# Altium PCB Chip_Tester.PcbDoc
Units mil, origin at the board's own origin, x right, y up, seen from the top; angles counter-clockwise.
Board outline 6000 x 4000 mil, 2 copper layers (Top Layer, Bottom Layer); 2 components, 0 nets, 82 pads, 0 vias.
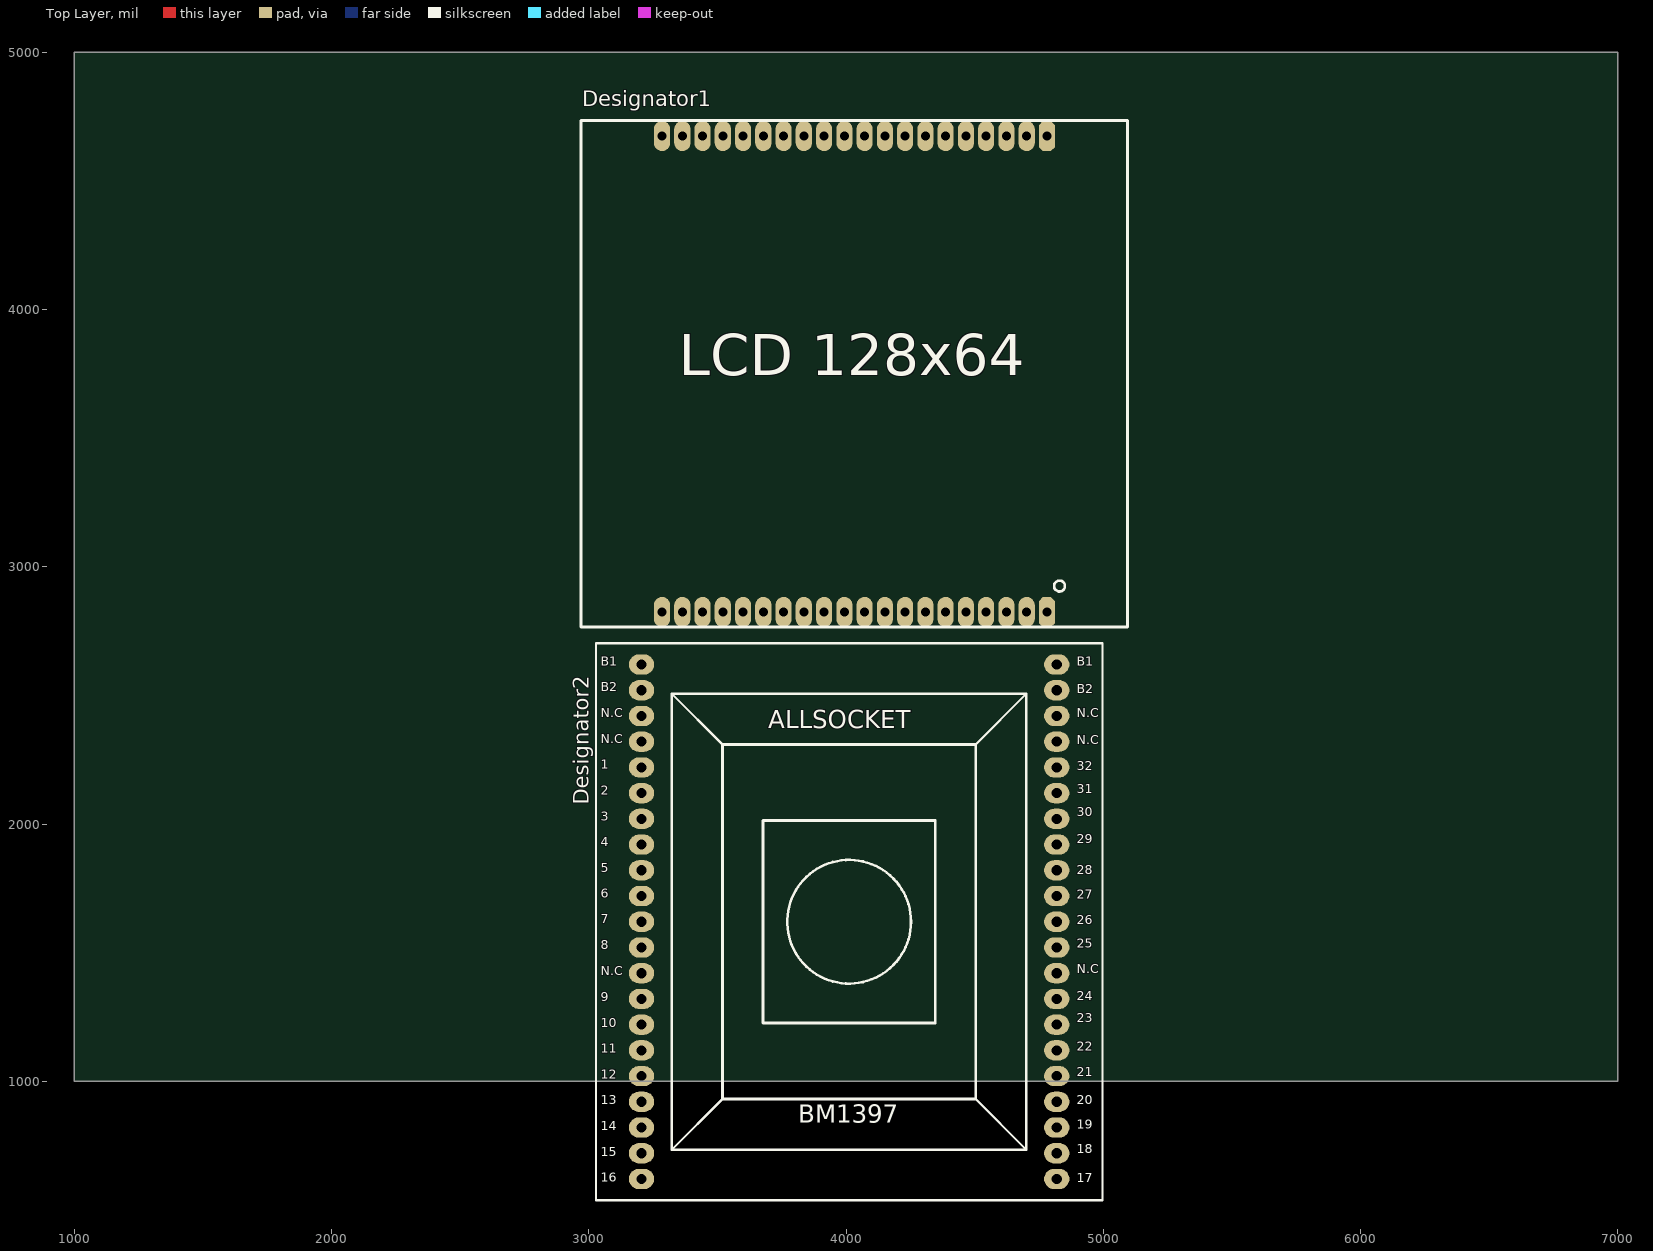
[diagram p0: Top Layer view]
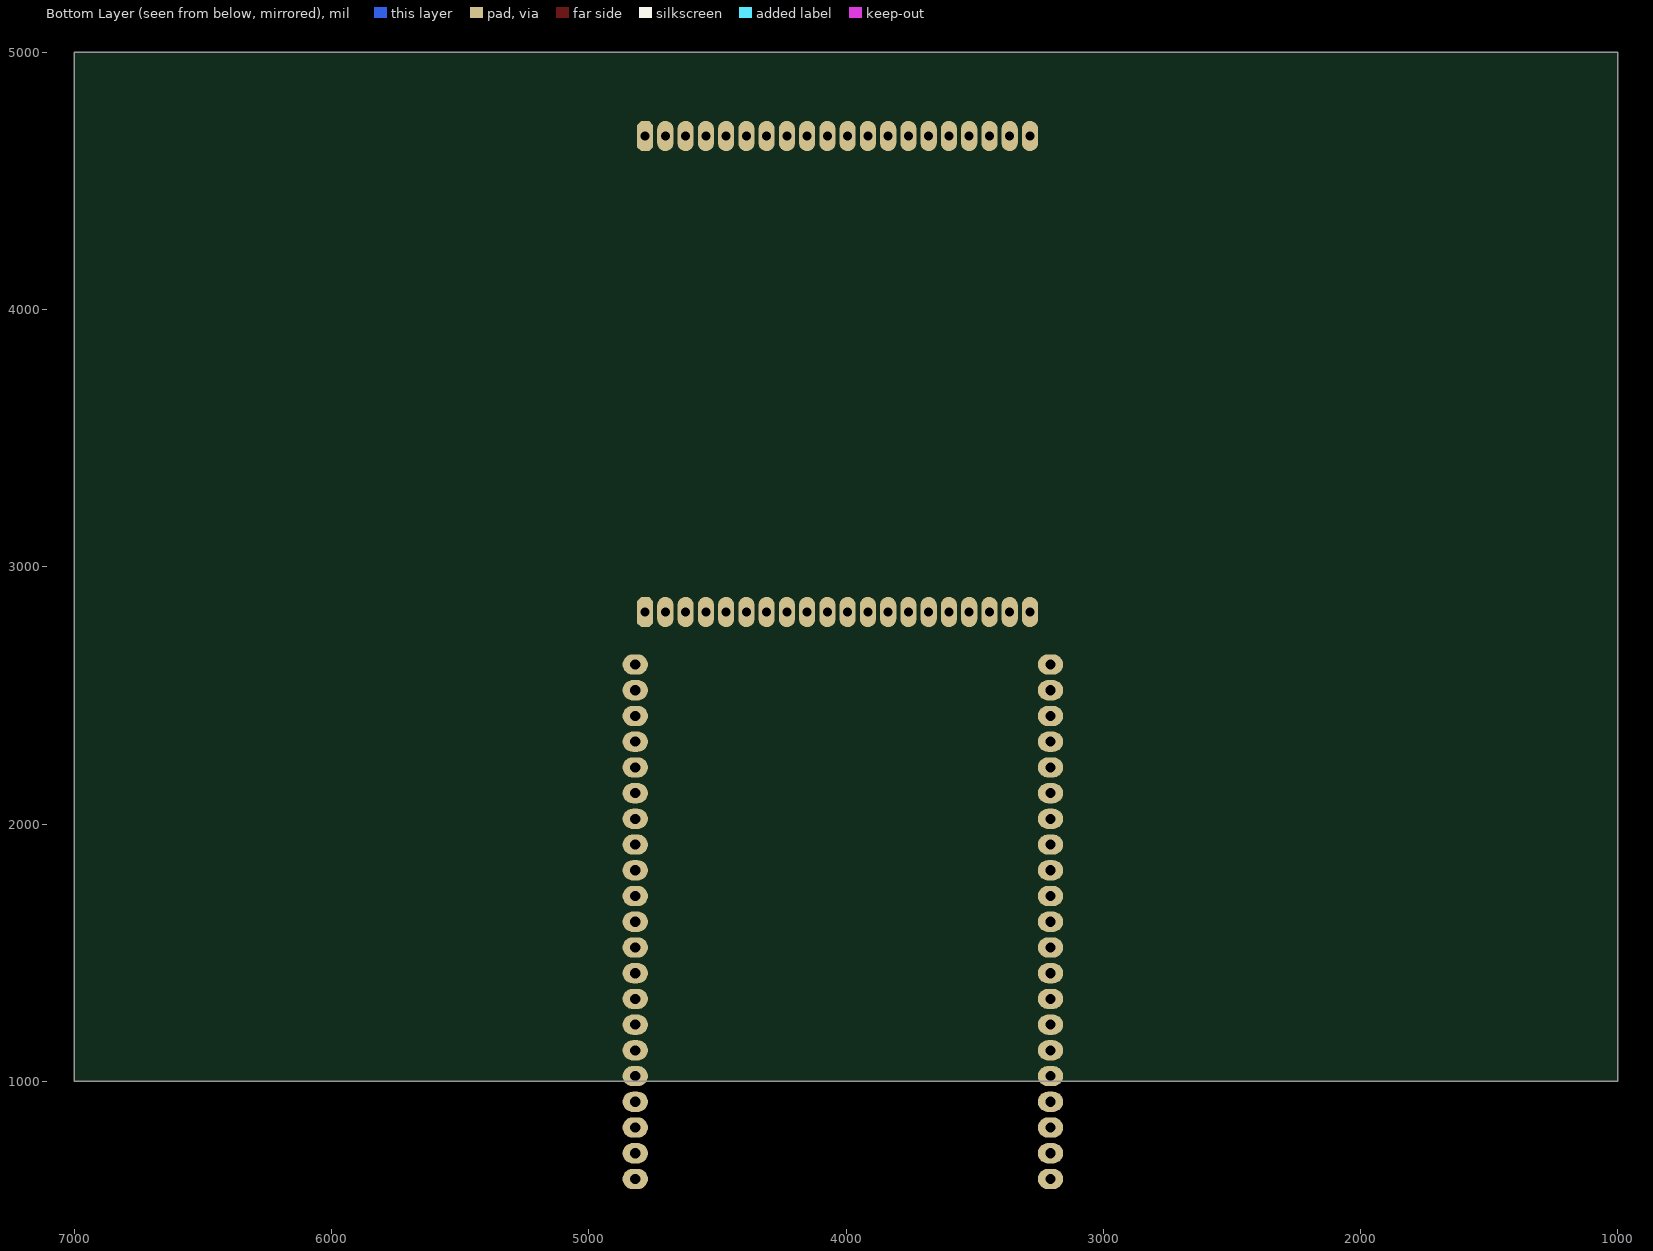
[diagram p1: Bottom Layer view, seen from below]

## Layer stack, top to bottom
Top Solder: solder mask 0.4, Solder Resist, Dk 3.5
Top Layer: signal copper 1.4
Dielectric 1: dielectric 12.6, FR-4, Dk 4.8
Bottom Layer: signal copper 1.4
Bottom Solder: solder mask 0.4, Solder Resist, Dk 3.5

## Board outline
1000,1000 7000,1000 7000,5000 1000,5000

## Design rules (kind name [scope] priority, off if disabled: settings)
Clearance [All] p1: gap=10 ignorepadtopadclearanceinfootprint=FALSE except(0: Arc-Hole Track-Hole SMDPad-Hole THPad-Hole Via-Hole Fill-Hole Poly-Hole Region-Hole Text-Hole)
PolygonConnect [All] p1: connectstyle=Relief reliefconductorwidth=10 reliefentries=4 polygonreliefangle="90 Angle" airgapwidth=10
RoutingVias [All] p1: holewidth=28 width=50 viastyle="Through Hole" minholewidth=28 minwidth=50 maxholewidth=28 maxwidth=50
SolderMaskExpansion [All] p1: expansion=4 istentingtop=FALSE
Width [All] p1: maxlimit=10 minlimit=10 preferedwidth=10
30 further rules are at their usual default settings.

## Components (designator, comment, footprint, x,y, rotation, side; value= is the part's Value field where it differs from the comment)
Designator1 "Comment" LCD 2970,2765 r0 top
Designator2 "Comment" AllSocket 3027.83,537.32 r0 top

## Footprints (in the part's own frame and the unit in brackets; to place one, negate y for a bottom-side part, rotate by r counter-clockwise, add the part's x,y. Pads: shape width x height; smd on the part's side, far side on the other; paste and mask are expansions set on the pad)
AllSocket [mm]
  oval 2.5x2 hole 1: 1(4.5,42.74) 2(4.5,40.2) 3(4.5,37.66) 4(4.5,35.12) 5(4.5,32.58) 6(4.5,30.04) 7(4.5,27.5) 8(4.5,24.96) 9(4.5,19.88) 10(4.5,17.34) 11(4.5,14.8) 12(4.5,12.26) 13(4.5,9.72) 14(4.5,7.18) 15(4.5,4.64) 16(4.5,2.1) 17(45.5,2.1) 18(45.5,4.64) 19(45.5,7.18) 20(45.5,9.72) 21(45.5,12.26) 22(45.5,14.8) 23(45.5,17.34) 24(45.5,19.88) 25(45.5,24.96) 26(45.5,27.5) 27(45.5,30.04) 28(45.5,32.58) 29(45.5,35.12) 30(45.5,37.66) 31(45.5,40.2) 32(45.5,42.74) 33(4.5,52.9) 33(45.5,52.9) 34(4.5,50.36) 34(45.5,50.36) NC(4.5,22.42) NC(4.5,45.28) NC(4.5,47.82) NC(45.5,22.42) NC(45.5,45.28) NC(45.5,47.82)
  silkscreen extent 0,0 50.04,55
LCD [mm]
  oct 1.6x3 hole 0.9: 1(46,1.5) 1(46,48.5)
  oval 1.6x3 hole 0.9: 2(44,1.5) 2(44,48.5) 3(42,1.5) 3(42,48.5) 4(40,1.5) 4(40,48.5) 5(38,1.5) 5(38,48.5) 6(36,1.5) 6(36,48.5) 7(34,1.5) 7(34,48.5) 8(32,1.5) 8(32,48.5) 9(30,1.5) 9(30,48.5) 10(28,1.5) 10(28,48.5) 11(26,1.5) 11(26,48.5) 12(24,1.5) 12(24,48.5) 13(22,1.5) 13(22,48.5) 14(20,1.5) 14(20,48.5) 15(18,1.5) 15(18,48.5) 16(16,1.5) 16(16,48.5) 17(14,1.5) 17(14,48.5) 18(12,1.5) 18(12,48.5) 19(10,1.5) 19(10,48.5) 20(8,1.5) 20(8,48.5)
  silkscreen extent 0,0 53.97,50.04, body extent 0.18,0.02 54.18,50.02, height 7.35

## Nets (pads, with @x,y where several pads share a name; then routed paths per layer and width w, separated by ;. In a path a pad name is that pad's centre, name@x,y a point inside that pad or via, vN(x,y) a via of type N, cw(c..) or ccw(c..) an arc to the next point about the centre after c; other vN are vias at no path point)
pads on no net: Designator1.1 Designator1.2 Designator1.3 Designator1.4 Designator1.5 Designator1.6 Designator1.7 Designator1.8 Designator1.9 Designator1.10 Designator1.11 Designator1.12 Designator1.13 Designator1.14 Designator1.15 Designator1.16 Designator1.17 Designator1.18 Designator1.19 Designator1.20 Designator2.1 Designator2.2 Designator2.3 Designator2.4 Designator2.5 Designator2.6 Designator2.7 Designator2.8 Designator2.9 Designator2.10 Designator2.11 Designator2.12 Designator2.13 Designator2.14 Designator2.15 Designator2.16 Designator2.17 Designator2.18 Designator2.19 Designator2.20 Designator2.21 Designator2.22 Designator2.23 Designator2.24 Designator2.25 Designator2.26 Designator2.27 Designator2.28 Designator2.29 Designator2.30 Designator2.31 Designator2.32 Designator2.33 Designator2.34 Designator2.NC

## Text inside footprints (layer, text, board x,y; h text height)
Designator1: Top Overlay "LCD 128x64" at 3349.37,3692.67 h275.59
Designator2: Top Overlay "ALLSOCKET" at 3697.13,2349.76 h118.11; Top Overlay "17" at 4897.91,596.38 h60; Top Overlay "26" at 4897.91,1597.98 h60; Top Overlay "32" at 4897.91,2197.98 h60; Top Overlay "31" at 4897.91,2107.98 h60; Top Overlay "30" at 4897.91,2017.98 h60; Top Overlay "29" at 4897.91,1913.04 h60; Top Overlay "28" at 4897.91,1793.04 h60; Top Overlay "27" at 4897.91,1697.32 h60; Top Overlay "25" at 4897.91,1507.98 h60; Top Overlay "24" at 4897.91,1302.32 h60; Top Overlay "23" at 4897.91,1217.98 h60; Top Overlay "22" at 4897.91,1107.32 h60; Top Overlay "21" at 4897.91,1007.32 h60; Top Overlay "20" at 4897.91,897.98 h60; Top Overlay "19" at 4897.91,803.04 h60; Top Overlay "18" at 4897.91,708.04 h60; Top Overlay "16" at 3047.52,597.03 h60; Top Overlay "15" at 3047.52,697.65 h60; Top Overlay "14" at 3047.52,798.26 h60; Top Overlay "13" at 3047.52,898.21 h60; Top Overlay "12" at 3047.52,998.83 h60; Top Overlay "11" at 3047.52,1098.78 h60; Top Overlay "10" at 3047.52,1198.74 h60; Top Overlay "9" at 3047.52,1299.35 h60; Top Overlay "B1" at 3047.52,2604.25 h60; Top Overlay "B1" at 4897.91,2604.25 h60; Top Overlay "B2" at 4897.91,2497.32 h60; Top Overlay "B2" at 3047.52,2504.3 h60; Top Overlay "N.C" at 3047.52,2403.21 h60; Top Overlay "N.C" at 3047.52,2302.13 h60; Top Overlay "N.C" at 4897.91,2402.98 h60; Top Overlay "N.C" at 4897.91,2297.98 h60; Top Overlay "N.C" at 4897.91,1407.98 h60; Top Overlay "N.C" at 3047.52,1400.03 h60; Top Overlay "BM1397" at 3815.24,814.33 h118.11; Top Overlay "4" at 3047.52,1901.65 h60; Top Overlay "5" at 3047.52,1801.7 h60; Top Overlay "2" at 3047.52,2102.22 h60; Top Overlay "6" at 3047.52,1701.08 h60; Top Overlay "3" at 3047.52,2001.61 h60; Top Overlay "8" at 3047.52,1501.11 h60; Top Overlay "7" at 3047.52,1601.78 h60; Top Overlay "1" at 3047.52,2202.18 h60